# Altium PCB PCB1.PcbDoc
Units mm, origin at the board's own origin, x right, y up, seen from the top; angles counter-clockwise.
Board outline 90.68 x 96.77 mm, 2 copper layers (Top Layer, Bottom Layer); 52 components, 34 nets, 229 pads, 27 vias.
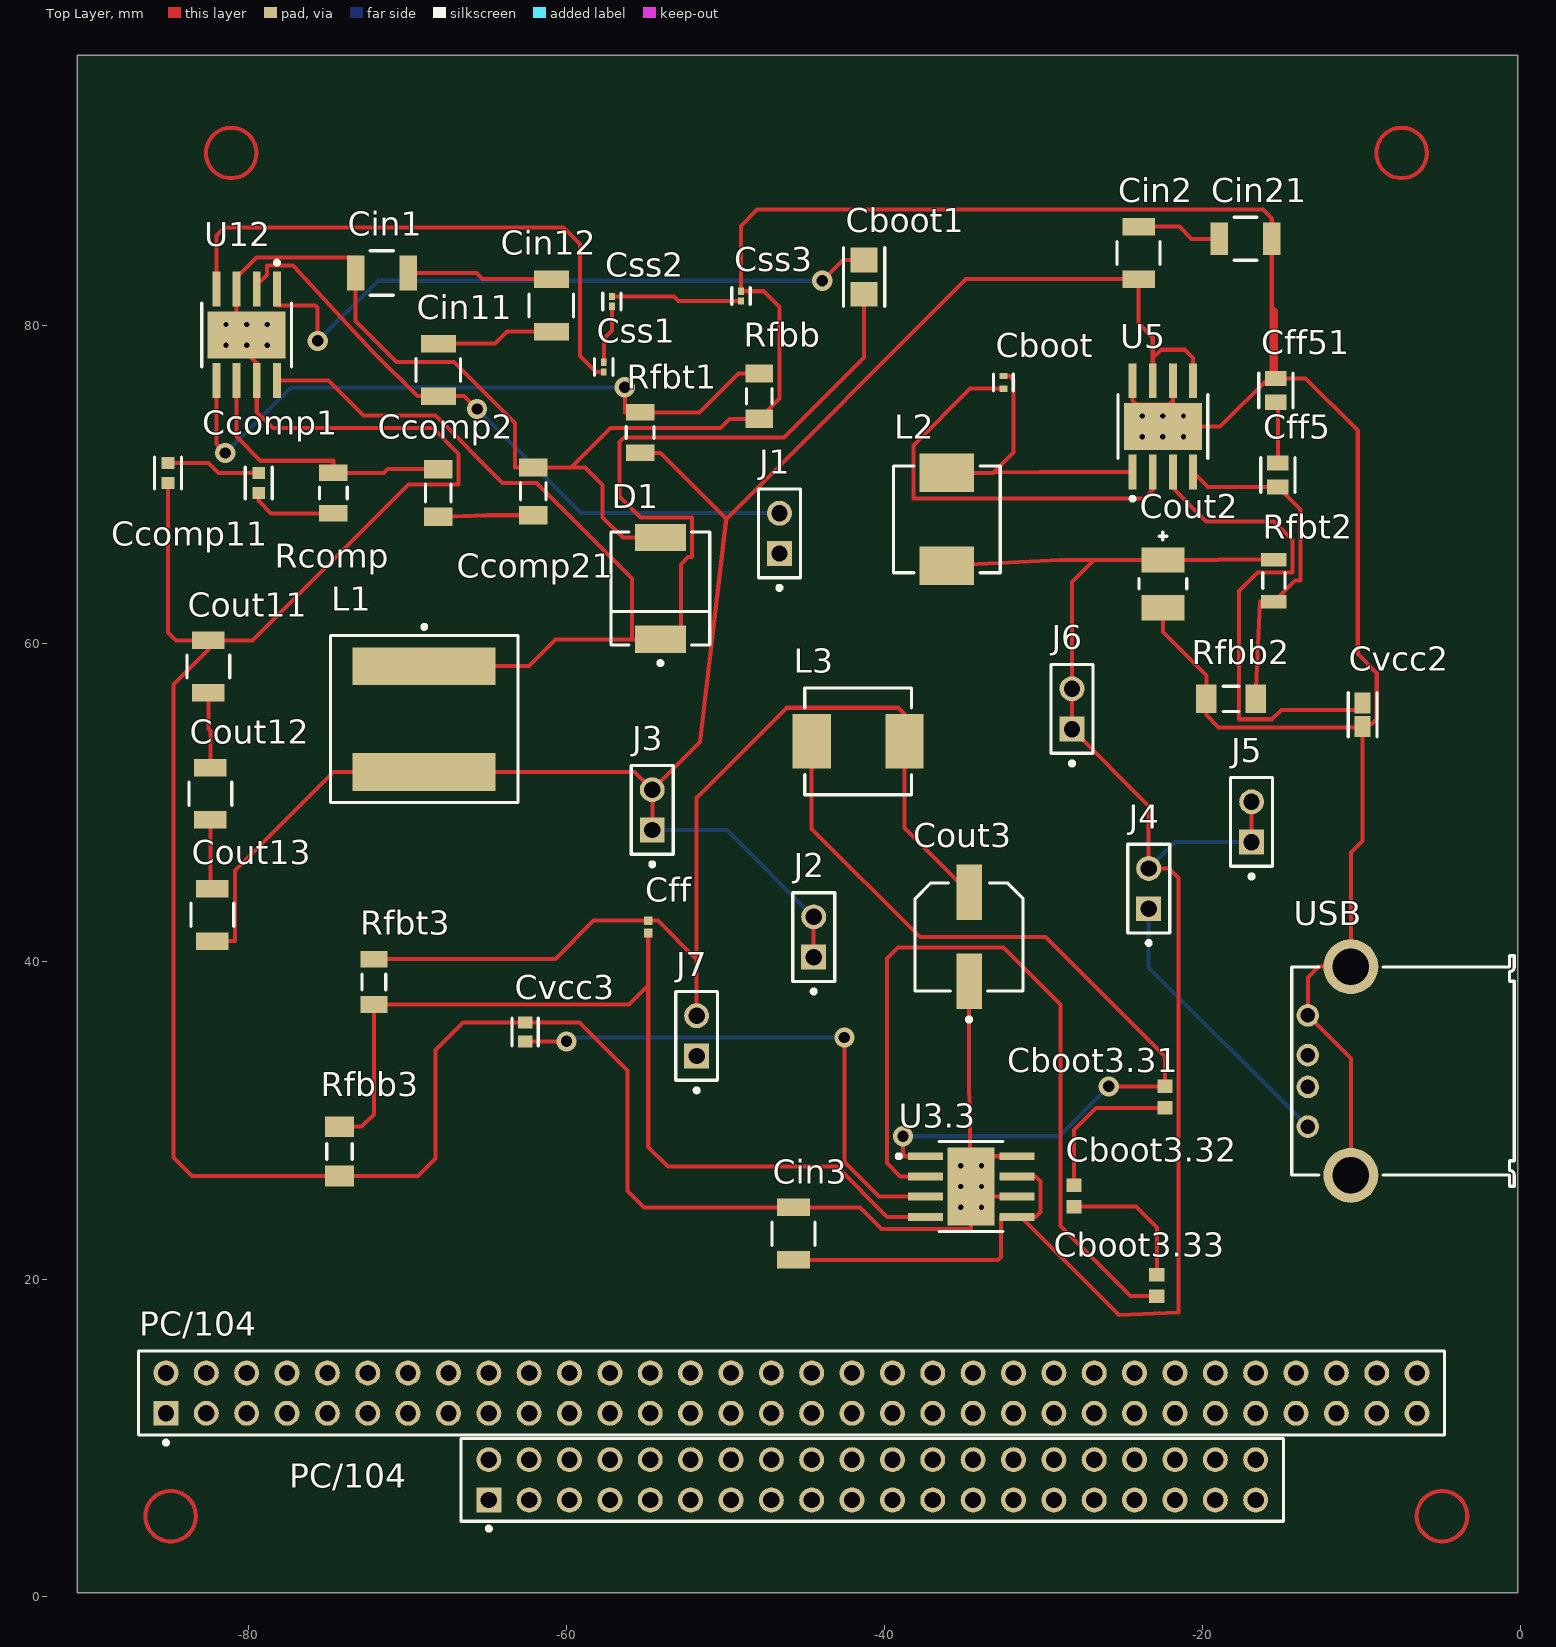
[diagram p0: Top Layer view]
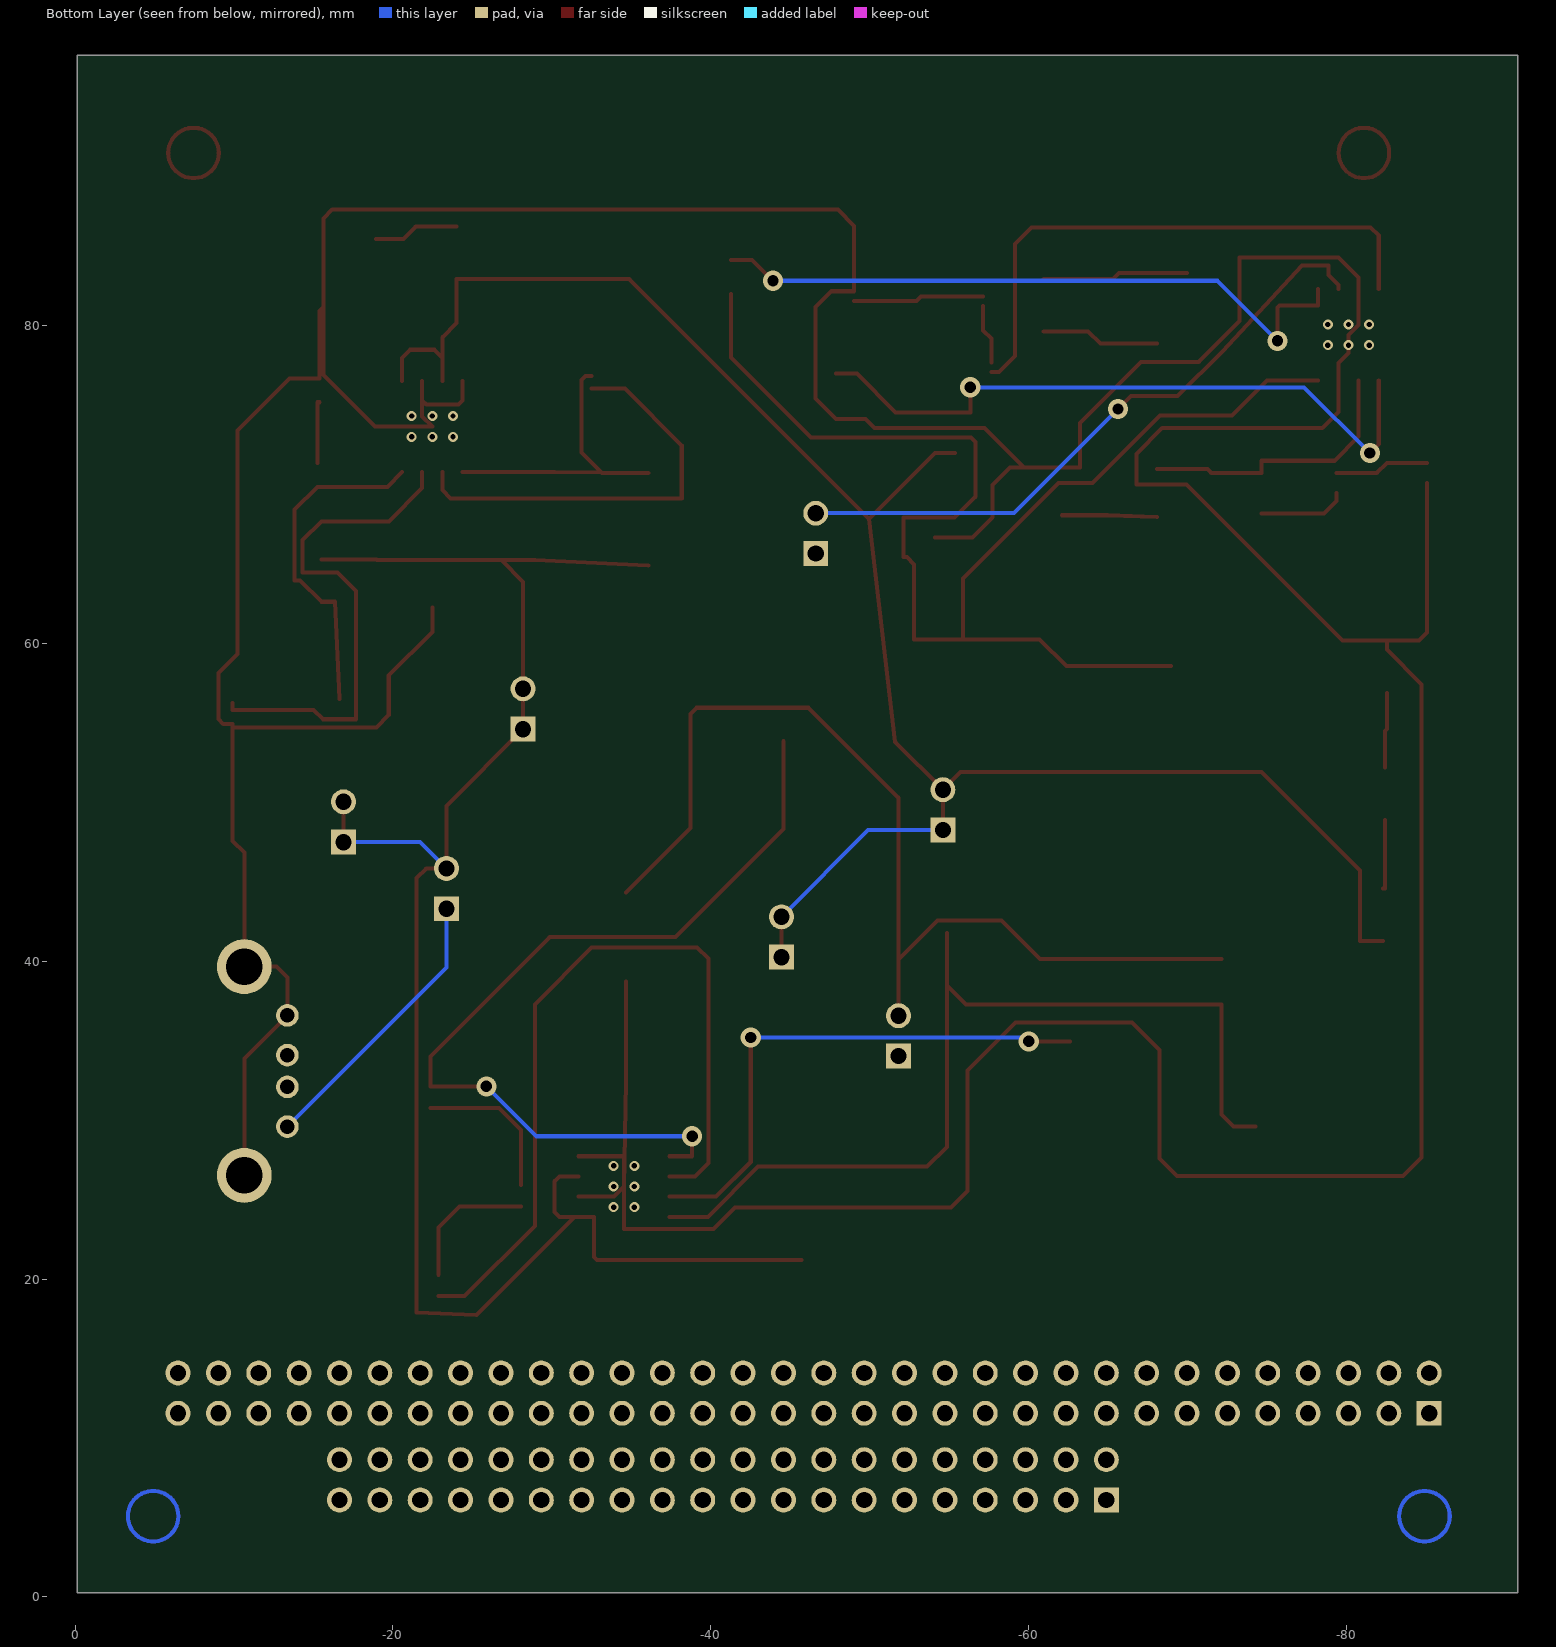
[diagram p1: Bottom Layer view, seen from below]
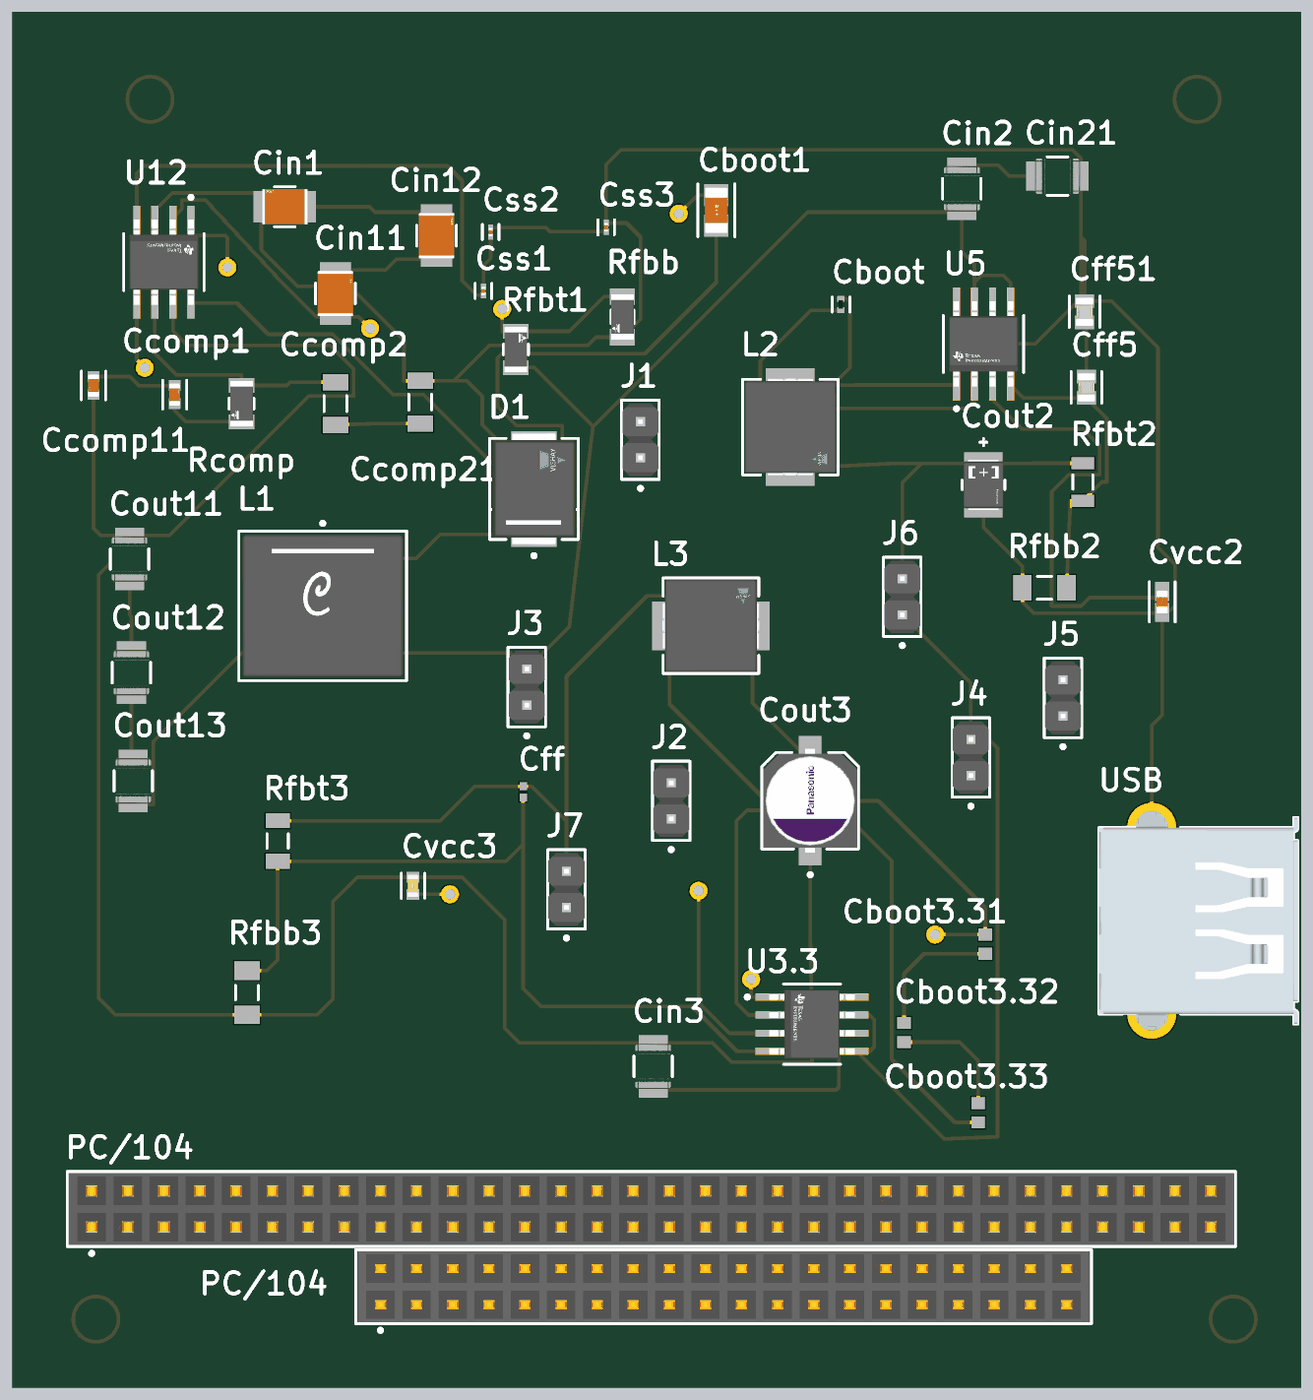
[diagram p2: 3D render of the assembled board from above, using the file's embedded part models]

## Layer stack, top to bottom
Top Solder: solder mask 0.0102, Solder Resist, Dk 3.5
Top Layer: signal copper 0.0356
Dielectric 1: dielectric 0.32, FR-4, Dk 4.8
Bottom Layer: signal copper 0.0356
Bottom Solder: solder mask 0.0102, Solder Resist, Dk 3.5

## Board outline
-90.805,0.254 -0.127,0.254 -0.127,97.028 -90.805,97.028

## Design rules (kind name [scope] priority, off if disabled: settings)
Clearance [All] p1: gap=0.254 ignorepadtopadclearanceinfootprint=FALSE except(0: Arc-Hole Track-Hole SMDPad-Hole THPad-Hole Via-Hole Fill-Hole Poly-Hole Region-Hole Text-Hole)
PolygonConnect [All] p1: connectstyle=Relief reliefconductorwidth=0.254 reliefentries=4 polygonreliefangle="90 Angle" airgapwidth=0.254
RoomDefinition Sheet1 [InComponentClass('Sheet1')] p1: confinementstyle=ConfineIn formatcopy=TRUE lockcomponents=FALSE outline 76.073,-2.717 473.202,-2.717 473.202,38.354 76.073,38.354
RoutingVias [All] p1: holewidth=0.711 width=1.27 viastyle="Through Hole" minholewidth=0.711 minwidth=1.27 maxholewidth=0.711 maxwidth=1.27
SolderMaskExpansion [All] p1: expansion=0.102 istentingtop=FALSE
Width [All] p1: maxlimit=0.254 minlimit=0.254 preferedwidth=0.254
30 further rules are at their usual default settings.

## Components (designator, comment, footprint, x,y, rotation, side; value= is the part's Value field where it differs from the comment)
Cboot "GRM155R71C104KA88D" FP-GRM15-MFG -32.512,76.435 r90 top value=0.10μF
Cboot1 "C3216C0G1H104K160AA" FP-C3216-160-0_2-IPC_C -41.275,83.058 r270 top
Cboot3.31 "GRM188R61E104KA01D" CAPC1608X90X35NL10T15 -22.352,31.456 r90 top
Cboot3.32 "GRM188R61E104KA01D" CAPC1608X90X35NL10T15 -28.067,25.233 r90 top
Cboot3.33 "GRM188R61E104KA01D" CAPC1608X90X35NL10T15 -22.86,19.598 r90 top
Ccomp1 "GRM1885C1H102JA01D" FP-GRM188-0_1-e0_2_0_5-IPC_C -79.375,70.104 r90 top
Ccomp2 "CAP 1pF 50V 1206(3216)" CAPC1206(3216)100_N -68.072,69.469 r90 top value=1pF
Ccomp11 "GRM1885C1H102JA01D" FP-GRM188-0_1-e0_2_0_5-IPC_C -85.09,70.739 r270 top
Ccomp21 "CAP 1pF 50V 1206(3216)" CAPC1206(3216)100_N -62.103,69.572 r270 top value=1pF
Cff "GRM1555C1E120JA01D" CAPC1005X55X25LL05T10 -54.864,42.164 r90 top
Cff5 "C0805C100K5GACTU" FP-C0805C-DN-MFG -15.24,70.612 r90 top value="10 pF"
Cff51 "C0805C100K5GACTU" FP-C0805C-DN-MFG -15.367,75.934 r90 top value="10 pF"
Cin1 "C3225X7R1H106M250AC" FP-C3225-250-0_4-MFG -71.629,83.312 r180 top
Cin2 "GRM32ER61E226KE15L" FP-GRM32-MFG -24.003,84.583 r90 top value=22uF
Cin3 "GRM32ER61E226KE15L" FP-GRM32-MFG -45.72,22.86 r90 top value=22uF
Cin11 "C3225X7R1H106M250AC" FP-C3225-250-0_4-MFG -68.072,77.217 r90 top
Cin12 "C3225X7R1H106M250AC" FP-C3225-250-0_4-MFG -60.96,81.28 r90 top
Cin21 "GRM32ER61E226KE15L" FP-GRM32-MFG -17.273,85.471 r0 top value=22uF
Cout2 "8TPE100MAZB" FP-POSCAP-B2-MFG -22.479,63.754 r90 top
Cout3 "16SVPE180M" FP-OS-CON-SMT-C10-MFG -34.671,41.535 r90 top
Cout11 "GRM32ER61E226KE15L" FP-GRM32-MFG -82.55,58.547 r90 top value=22uF
Cout12 "GRM32ER61E226KE15L" FP-GRM32-MFG -82.423,50.546 r90 top value=22uF
Cout13 "GRM32ER61E226KE15L" FP-GRM32-MFG -82.296,42.927 r90 top value=22uF
Css1 "GRM033R61A272KA01D" FP-GRM033-0_03-IPC_B -57.658,77.393 r90 top
Css2 "GRM033R61A272KA01D" FP-GRM033-0_03-IPC_B -57.15,81.534 r90 top
Css3 "GRM033R61A272KA01D" FP-GRM033-0_03-IPC_B -49.022,81.865 r90 top
Cvcc2 "C1608X6S1C225K080AC" FP-C1608-080-0_1-IPC_A -9.906,55.52 r270 top
Cvcc3 "C0603C225K8PACTU" FP-C0603C225K8PACTU-MFG -62.611,35.56 r90 top
D1 "SSC54-E3/57T" FP-95402-MFG -54.102,63.47 r90 top
J1 "M20-9990246" FP-M20-9990246-MFG -46.609,66.929 r90 top
J2 "M20-9990246" FP-M20-9990246-MFG -44.45,41.529 r90 top
J3 "M20-9990246" FP-M20-9990246-MFG -54.61,49.53 r90 top
J4 "M20-9990246" FP-M20-9990246-MFG -23.368,44.577 r90 top
J5 "M20-9990246" FP-M20-9990246-MFG -16.891,48.768 r90 top
J6 "M20-9990246" FP-M20-9990246-MFG -28.194,55.88 r90 top
J7 "M20-9990246" FP-M20-9990246-MFG -51.816,35.306 r90 top
L1 "XAL1010-153MED" FP-XAL1010-MFG -68.961,55.245 r270 top
L2 "IHLP2525CZER8R2M11" FP-IHLP-2525CZ-FP_2_413x3-MFG -36.068,67.818 r270 top
L3 "IHLP2525CZER4R7M01" FP-IHLP-2525CZ-FP_2_413x3-MFG -41.656,53.848 r0 top
PC/104 "M20-6102045" FP-M20-6102045-MFG -40.767,7.366 r0 top (schematic designator J?)
PC/104 "4P02-2D02-DA" FP-4P02-2D02-DA-MFG -45.847,12.827 r0 top
Rcomp "CRCW120614K7FKEA" FP-CRCW1206-e3-MFG -74.676,69.469 r270 top
Rfbb "CRCW1206732RFKEA" FP-CRCW1206-e3-IPC_B -47.879,75.565 r270 top
Rfbb2 "CRCW120622K1FKEA" RESC3216X60X45ML10T20 -18.187,56.515 r180 top
Rfbb3 "CRCW120622K1FKEA" RESC3216X60X45ML10T20 -74.295,28.041 r90 top
Rfbt1 "CRCW120610K2FKEA" FP-CRCW1206-e3-MFG -55.372,73.274 r90 top
Rfbt2 "RC1206FR-0788K7L" RESC3116X65X40LL10T20 -15.494,63.953 r90 top
Rfbt3 "RC1206FR-0751KL" RESC3116X65X40NL10T20 -72.136,38.707 r90 top
U3.3 "LMR23630ADDAR" FP-DDA0008E-MFG -34.544,25.827 r0 top
U5 "LMR23630ADDAR" FP-DDA0008E-MFG -22.479,73.66 r90 top
U12 "TPS54531DDAR" FP-DDA0008E-MFG -80.137,79.421 r270 top
USB "61400416021" 61400416021 -7.366,33.097 r90 top

## Footprints (in the part's own frame and the unit in brackets; to place one, negate y for a bottom-side part, rotate by r counter-clockwise, add the part's x,y. Pads: shape width x height; smd on the part's side, far side on the other; paste and mask are expansions set on the pad)
61400416021 [mm] "USB 2.0 Type A Horizontal"
  round 1.42 hole 0.92: 1(-3.5,5.99) 2(-1,5.99) 3(1,5.99) 4(3.5,5.99)
  round 3.45 hole 2.3: Shell(-6.57,3.28) Shell(6.57,3.28)
  silkscreen extent -7.25,-7 7.25,7, body extent -8,-7 8,7, height 7.63
CAPC1005X55X25LL05T10 [mm] "Chip Capacitor, 2-Leads, Body 1.00x0.50mm, IPC High Density"
  rect 0.56x0.52 smd: 1(-0.39,0) 2(0.39,0)
  body extent -0.53,-0.28 0.53,0.28, height 0.55
CAPC1206(3216)100_N [mm] "Chip Capacitor, Body 3.2x1.6mm, Height 1mm, IPC Medium Density"
  rect 1.15x1.8 smd: 1(-1.5,0) 2(1.5,0)
  silkscreen extent -0.55,-0.8 0.55,0.8, body extent -1.7,-0.9 1.7,0.9, height 1
CAPC1608X90X35NL10T15 [mm] "Chip Capacitor, 2-Leads, Body 1.60x0.80mm, IPC Medium Density"
  rect 0.85x0.95 smd: 1(-0.675,0) 2(0.675,0)
  body extent -0.85,-0.45 0.85,0.45, height 0.9
FP-4P02-2D02-DA-MFG [mm]
  rect 1.57x1.57 hole 1.02 paste-1000 mask+0: 1(-39.37,-1.27)
  round 1.57 hole 1.02 paste-1000 mask+0: 2(-39.37,1.27) 3(-36.83,-1.27) 4(-36.83,1.27) 5(-34.29,-1.27) 6(-34.29,1.27) 7(-31.75,-1.27) 8(-31.75,1.27) 9(-29.21,-1.27) 10(-29.21,1.27) 11(-26.67,-1.27) 12(-26.67,1.27) 13(-24.13,-1.27) 14(-24.13,1.27) 15(-21.59,-1.27) 16(-21.59,1.27) 17(-19.05,-1.27) 18(-19.05,1.27) 19(-16.51,-1.27) 20(-16.51,1.27) 21(-13.97,-1.27) 22(-13.97,1.27) 23(-11.43,-1.27) 24(-11.43,1.27) 25(-8.89,-1.27) 26(-8.89,1.27) 27(-6.35,-1.27) 28(-6.35,1.27) 29(-3.81,-1.27) 30(-3.81,1.27) 31(-1.27,-1.27) 32(-1.27,1.27) 33(1.27,-1.27) 34(1.27,1.27) 35(3.81,-1.27) 36(3.81,1.27) 37(6.35,-1.27) 38(6.35,1.27) 39(8.89,-1.27) 40(8.89,1.27) 41(11.43,-1.27) 42(11.43,1.27) 43(13.97,-1.27) 44(13.97,1.27) 45(16.51,-1.27) 46(16.51,1.27) 47(19.05,-1.27) 48(19.05,1.27) 49(21.59,-1.27) 50(21.59,1.27) 51(24.13,-1.27) 52(24.13,1.27) 53(26.67,-1.27) 54(26.67,1.27) 55(29.21,-1.27) 56(29.21,1.27) 57(31.75,-1.27) 58(31.75,1.27) 59(34.29,-1.27) 60(34.29,1.27) 61(36.83,-1.27) 62(36.83,1.27) 63(39.37,-1.27) 64(39.37,1.27)
  silkscreen extent -41.09,-3.24 41.09,2.64, body extent -41.19,-2.74 41.19,2.74, height 0.25
FP-95402-MFG [mm]
  rect 1.72x3.2 smd paste+0 mask+0: 1(-3.205,0) 2(3.205,0)
  silkscreen extent -4.82,-3.11 3.55,3.11, body extent -4.17,-3.21 4.17,3.21, height 0.25
FP-C0603C225K8PACTU-MFG [mm]
  rect 0.75x0.9 smd paste+0 mask+0: 1(-0.6,0) 2(0.6,0)
  silkscreen extent -0.87,-0.82 0.87,0.82, body extent -1.2,-0.6 1.2,0.6, height 0.25
FP-C0805C-DN-MFG [mm]
  rect 0.95x1.35 smd paste+0 mask+0: 1(-0.75,0) 2(0.75,0)
  silkscreen extent -1.1,-1.07 1.1,1.07, body extent -1.4,-0.85 1.4,0.85, height 0.25
FP-C1608-080-0_1-IPC_A [mm]
  rect 1.331x1.012 smd paste+0 mask+0: 1(-0.741,0) 2(0.741,0)
  silkscreen extent -1.41,-0.91 1.41,0.91, body extent -1.91,-1.01 1.91,1.01, height 0.25
FP-C3216-160-0_2-IPC_C [mm]
  rect 1.554x1.706 smd paste+0 mask+0: 1(-1.076,0) 2(1.076,0)
  silkscreen extent -1.85,-1.3 1.85,1.3, body extent -1.95,-1 1.95,1, height 0.25
FP-C3225-250-0_4-MFG [mm]
  rect 1.1x2.2 smd paste+0 mask+0: 1(-1.65,0) 2(1.65,0)
  silkscreen extent -0.73,-1.4 0.73,1.4, body extent -2.3,-1.5 2.3,1.5, height 0.25
FP-CRCW1206-e3-IPC_B [mm]
  rect 1.156x1.758 smd paste+0 mask+0: 1(-1.426,0) 2(1.426,0)
  silkscreen extent -0.47,-0.8 0.47,0.8, body extent -2.25,-1.13 2.25,1.13, height 0.25
FP-CRCW1206-e3-MFG [mm]
  rect 1.05x1.8 smd paste+0 mask+0: 1(-1.275,0) 2(1.275,0)
  silkscreen extent -0.38,-0.87 0.38,0.87, body extent -1.9,-1 1.9,1, height 0.25
FP-DDA0008E-MFG [mm]
  rect 2.2x0.5 smd paste-1000 mask+0: 1(-2.875,1.905) 2(-2.875,0.635) 3(-2.875,-0.635) 4(-2.875,-1.905) 5(2.875,-1.905) 6(2.875,-0.635) 7(2.875,0.635) 8(2.875,1.905)
  rect 2.95x4.9 smd paste-1000 mask-1000: 9(0,0)
  silkscreen extent -4.67,-2.82 2,2.82, body extent -4.08,-2.68 4.08,2.68, height 0.25
FP-GRM15-MFG [mm]
  rect 0.4x0.5 smd paste+0 mask+0: 1(-0.4,0) 2(0.4,0)
  silkscreen extent -0.53,-0.62 0.53,0.62, body extent -0.7,-0.38 0.7,0.38, height 0.25
FP-GRM32-MFG [mm]
  rect 1.1x2.05 smd paste+0 mask+0: 1(-1.65,0) 2(1.65,0)
  silkscreen extent -0.73,-1.35 0.73,1.35, body extent -2.3,-1.45 2.3,1.45, height 0.25
FP-GRM033-0_03-IPC_B [mm]
  rect 0.454x0.363 smd paste+0 mask+0: 1(-0.304,0) 2(0.304,0)
  silkscreen extent -0.53,-0.58 0.53,0.58, body extent -0.68,-0.33 0.68,0.33, height 0.25
FP-GRM188-0_1-e0_2_0_5-IPC_C [mm]
  rect 0.759x0.812 smd paste+0 mask+0: 1(-0.627,0) 2(0.627,0)
  silkscreen extent -1.01,-0.85 1.01,0.85, body extent -1.11,-0.55 1.11,0.55, height 0.25
FP-IHLP-2525CZ-FP_2_413x3-MFG [mil]
  rect 95x135 smd paste+0 mask+0: 1(-115,0) 2(115,0)
  silkscreen extent -132,-132 132,132, body extent -166,-136 166,136, height 10
FP-M20-6102045-MFG [mm]
  rect 1.57x1.57 hole 1.02 paste-1000 mask+0: 1(-24.13,-1.27)
  round 1.57 hole 1.02 paste-1000 mask+0: 2(-24.13,1.27) 3(-21.59,-1.27) 4(-21.59,1.27) 5(-19.05,-1.27) 6(-19.05,1.27) 7(-16.51,-1.27) 8(-16.51,1.27) 9(-13.97,-1.27) 10(-13.97,1.27) 11(-11.43,-1.27) 12(-11.43,1.27) 13(-8.89,-1.27) 14(-8.89,1.27) 15(-6.35,-1.27) 16(-6.35,1.27) 17(-3.81,-1.27) 18(-3.81,1.27) 19(-1.27,-1.27) 20(-1.27,1.27) 21(1.27,-1.27) 22(1.27,1.27) 23(3.81,-1.27) 24(3.81,1.27) 25(6.35,-1.27) 26(6.35,1.27) 27(8.89,-1.27) 28(8.89,1.27) 29(11.43,-1.27) 30(11.43,1.27) 31(13.97,-1.27) 32(13.97,1.27) 33(16.51,-1.27) 34(16.51,1.27) 35(19.05,-1.27) 36(19.05,1.27) 37(21.59,-1.27) 38(21.59,1.27) 39(24.13,-1.27) 40(24.13,1.27)
  silkscreen extent -25.88,-3.19 25.88,2.6, body extent -25.98,-2.7 25.98,2.7, height 0.25
FP-M20-9990246-MFG [mm]
  rect 1.57x1.57 hole 1.02 paste-1000 mask+0: 1(-1.27,0)
  round 1.57 hole 1.02 paste-1000 mask+0: 2(1.27,0)
  silkscreen extent -3.55,-1.32 2.79,1.32, body extent -2.89,-1.42 2.89,1.42, height 0.25
FP-OS-CON-SMT-C10-MFG [mm]
  rect 3.5x1.6 smd paste+0 mask+0: 1(-2.8,0) 2(2.8,0)
  silkscreen extent -5.32,-3.4 3.4,3.4, body extent -4.8,-3.65 4.8,3.65, height 0.25
FP-POSCAP-B2-MFG [mm]
  rect 1.6x2.7 smd paste+0 mask+0: 1(-1.5,0) 2(1.5,0)
  silkscreen extent -0.33,-1.5 3.25,1.5, body extent -2.4,-1.6 2.4,1.6, height 0.25
FP-XAL1010-MFG [mm]
  rect 2.38x9 smd paste+0 mask+0: 1(-3.325,0) 2(3.325,0)
  silkscreen extent -5.92,-5.9 5.25,5.9, body extent -5.35,-6 5.35,6, height 0.25
RESC3116X65X40LL10T20 [mm] "Chip Resistor, 2-Leads, Body 3.10x1.60mm, IPC High Density"
  rect 0.85x1.6 smd: 1(-1.325,0) 2(1.325,0)
  silkscreen extent -0.5,-0.7 0.5,0.7, body extent -1.6,-0.85 1.6,0.85, height 0.65
RESC3116X65X40NL10T20 [mm] "Chip Resistor, 2-Leads, Body 3.10x1.60mm, IPC Medium Density"
  rect 1.05x1.7 smd: 1(-1.425,0) 2(1.425,0)
  silkscreen extent -0.5,-0.75 0.5,0.75, body extent -1.6,-0.85 1.6,0.85, height 0.65
RESC3216X60X45ML10T20 [mm] "Chip Resistor, 2-Leads, Body 3.20x1.60mm, IPC Low Density"
  rect 1.3x1.8 smd: 1(-1.55,0) 2(1.55,0)
  silkscreen extent -0.5,-0.8 0.5,0.8, body extent -1.65,-0.85 1.65,0.85, height 0.6

## Part data
Cboot: library part CMP-2100-03641-2, "CAP CER 0.1UF 16V X7R 0402", Capacitance=0.10μF, Manufacturer=Murata, Package=GRM15, Temperature="-55°C to +125°C", Temperature Characteristic=X7R, Temperature Range High=+125°C, Temperature Range Low=-55°C, Tolerance=10%, Voltage Rating=16Vdc, Category=Cap, ComponentLink2Description=Datasheet, ComponentLink2URL=https://search.murata.co.jp/Ceramy/image/img/A01X/G101/ENG/GRM155R71H471KA01-01A.pdf, Device Class L1="Passive Components", Device Class L2=Capacitors, Device Class L3="Ceramic Capacitors", Digikey Description="CAP CER 0.1UF 16V X7R 0402", Height=0.55mm, Ipc Land Pattern Name=CAPC10050X219, Lead Free=yes, Manufacturer Part Number=GRM155R71C104KA88D, Material=Ceramic, Mouser Description="0402 0.1 uF 16V ±10 % Tolerance X7R SMT Multilayer Ceramic Capacitor", Octopart=https://octopart.com/grm155r71c104ka88d-murata-196880, RoHS=TRUE, Standoff Height=0mm
Cboot1: library part CMP-08246-004826-1, "Multilayer Ceramic Capacitors 100nF ±10% 50V C0G SMD 1206", Capacitance=100nF, Case Code (Imperial)=1206, Case Code (Metric)=3216, Dielectric=C0G, Dielectric Material=Ceramic, Max Operating Temperature=125°C, Min Operating Temperature=-55°C, Package Quantity=2000, Tolerance=10%, Voltage Rating=50V, Case/Package=1206, Height=1.6mm, Lead Free="Lead Free", Length=0.126inch, Mount="Surface Mount", Packaging="Tape and Reel", RoHS Compliant=Yes, Series=C, Termination=SMD/SMT, Thickness=0.071inch, Voltage Rating (DC)=50V, Weight=0.000571oz, Width=0.063inch
Cboot3.31 Cboot3.32 Cboot3.33: library part CMP-2006-02508-1, Manufacturer=Murata, Part Number=GRM188R61E104KA01D
Ccomp1 Ccomp11: library part CMP-1662-00022-2, "Chip Multilayer Ceramic Capacitors for General Purpose, 0603, 1000pF, C0G, 30ppm/°C, 5%, 50V", Capacitance=1nF, Case Code (Imperial)=0603, Case Code (Metric)=1608, Dielectric=C0G, Dielectric Material=Ceramic, Insulation Resistance=10GR, Max Operating Temperature=125°C, Min Operating Temperature=-55°C, Package Quantity=1, Temperature Coefficient=30ppm/°C, Tolerance=5%, Voltage=50V, Case/Package=0603, Depth=0.8mm, Height=0.8mm, Lead Free="Lead Free", Length=1.6mm, Material=Ceramic, Mount="Surface Mount", Number of Pins=2, Packaging="Tape and Reel", Radiation Hardening=No, REACH SVHC="No SVHC", Termination=SMD/SMT, Thickness=0.035inch, Voltage Rating=50V, Voltage Rating (DC)=50V, Width=0.8mm
Ccomp2 Ccomp21: library part CMP-1037-00024-1, "CAP 1pF 50V ±0.25pF 1206 (3216 Metric) Thickness 1mm SMD", Case-EIA=1206, Case-Metric=3216, Rated Voltage="50 V", Tolerance=Â±0.25pF, Max Thickness="1 mm", Technology=SMT
Cff: library part CMP-2008-03987-1, Manufacturer=Murata, Part Number=GRM1555C1E120JA01D
Cff5 Cff51: library part CMP-2007-00462-2, "CAP CER 10PF 50V 10% NP0 0805", Capacitance="10 pF", Manufacturer=KEMET, Package=C0805C-DN, Temperature="-55°C to +125°C", Temperature Characteristic=C0G, Temperature Coefficient=30ppm/°C, Temperature Range High=+125°C, Temperature Range Low=-55°C, Tolerance=0.1, Voltage Rating="50 V", Automotive=No, Category=Cap, ComponentLink2Description=Datasheet, ComponentLink2URL=https://content.kemet.com/datasheets/KEM_C1003_C0G_SMD.pdf, Device Class L1="Passive Components", Device Class L2=Capacitors, Device Class L3="Ceramic Capacitors", Digikey Description="CAP CER 10PF 50V 10% NP0 0805", Height=0.88mm, Ipc Land Pattern Name=CAPC200125X78, Lead Free=Yes, Manufacturer Part Number=C0805C100K5GACTU, Material=Ceramic, Mouser Description="Multilayer Ceramic Capacitors MLCC - SMD/SMT 50volts 10pF C0G 10%", Octopart=https://octopart.com/c0805c100k5gactu-kemet-8089747, RoHS=TRUE
Cin1 Cin11 Cin12: library part CMP-08246-002653-1, "Multilayer Ceramic Capacitors 10uF ±20% 50V X7R SMD 1210", Capacitance=10uF, Case Code (Imperial)=1210, Case Code (Metric)=3225, Dielectric=X7R, Dielectric Material=Ceramic, Max Operating Temperature=125°C, Min Operating Temperature=-55°C, Package Quantity=1000, Tolerance=20%, Voltage Rating=50V, Case/Package=1210, Height=2.5mm, Lead Free="Lead Free", Length=0.126inch, Mount="Surface Mount", Packaging="Tape and Reel", REACH SVHC="No SVHC", Series=C, Termination=SMD/SMT, Thickness=0.11inch, Voltage Rating (DC)=50V, Weight=0.000564oz, Width=0.098inch
Cin2 Cin3 Cin21 Cout11 Cout12 Cout13: library part CMP-2000-05458-2, "CAP CER 22UF 25V X5R 1210", Capacitance=22uF, Manufacturer="Murata Electronics North America", Operating Temperature="-55°C ~ 85°C", Package=GRM32, Package / Case="1210 (3225 Metric)", Standard Package=1,000, Temperature="-55°C to +85°C", Temperature Characteristic=X5R, Temperature Range High=+85°C, Temperature Range Low=-55°C, Tolerance=10%, Voltage - Rated=25V, Applications="General Purpose", Automotive=No, Category=Cap, ComponentLink2Description=Datasheet, ComponentLink2URL=https://search.murata.co.jp/Ceramy/image/img/A01X/G101/ENG/GRM32ER61E226KE15-01A.pdf, Device Class L1="Passive Components", Device Class L2=Capacitors, Device Class L3="Ceramic Capacitors", Digikey Description="CAP CER 22UF 25V X5R 1210", Height=2.7mm, Lead Free=Yes, Manufacturer Part Number=GRM32ER61E226KE15L, Material=Ceramic, Mounting Type="Surface Mount, MLCC", Mouser Description="Multilayer Ceramic Capacitors MLCC - SMD/SMT 1210 22uF 25volts X5R 10%", Octopart=https://octopart.com/grm32er61e226ke15l-murata-197441, Other Names=490-3889-2, Packaging="Cut Tape (CT)", Possible Substitute=GRM32ER61E226KE15K, RoHS=TRUE, Size / Dimension="0.126\" L x 0.098\" W (3.20mm x 2.50mm)", Temperature Coefficient=X5R, Thickness (Max)="0.106\" (2.70mm)", Voltage Rating=25V
Cout2: library part CMP-05428-001341-1, "Molded Tantalum Polymer Capacitor 100uF 20% 8V life 1000Hours SMD 1411", Capacitance=100uF, Case Code (Imperial)=1210, Case Code (Metric)=3528, Case/Package=Molded, ESR (Equivalent Series Resistance)=35mR, Leakage Current=80uA, Max Operating Temperature=105°C, Min Operating Temperature=-55°C, Package Quantity=2000, Ripple Current=1.4A, Tolerance=20%, Voltage=8V, Construction=Flat, Depth=2.8mm, Dissipation Factor=8%, Features="General Purpose", Height=1.9mm, Height - Seated (Max)=0.079inch, Lead Free="Lead Free", Length=3.5mm, Mount="Surface Mount", Number of Pins=2, Packaging="Tape and Reel", Polarity=Polar, Radiation Hardening=No, REACH SVHC="No SVHC", RoHS Compliant=Yes, Series="POSCAP™ TPE", Termination=SMD/SMT, Voltage Rating=8V, Voltage Rating (DC)=8V, Width=2.8mm
Cout3: library part CMP-05428-000600-1, "CAP ALUM POLY 180UF 20% 16V SMD", Capacitance=180uF, Case/Package=Radial, ESR (Equivalent Series Resistance)=11mR, Leakage Current=576uA, Max Operating Temperature=105°C, Min Operating Temperature=-55°C, Package Quantity=500, Ripple Current=4.46A, Tolerance=20%, Voltage=16V, Construction=Cylindrical, Diameter=6.3mm, Dissipation Factor=12%, Height=9.9mm, Height - Seated (Max)=0.394inch, Lead Free="Lead Free", Length=9.9mm, Life (Hours)=2000Hour, Mount="Surface Mount", Number of Pins=10, Packaging="Tape and Reel", Polarity=Polar, Radiation Hardening=No, REACH SVHC="No SVHC", Ripple Current (AC)=4.46A, RoHS Compliant=Yes, Series="OS-CON™, SVPE", Termination=SMD/SMT, Voltage Rating=16V, Voltage Rating (DC)=16V
Css1 Css2 Css3: library part CMP-2010-01672-2, "Chip Multilayer Ceramic Capacitors for General Purpose, 0201, 2700pF, X5R, 15%, 10%, 10V", Capacitance=2.7nF, Case Code (Imperial)=0201, Case Code (Metric)=0603, Dielectric=X5R, Max Operating Temperature=85°C, Min Operating Temperature=-55°C, Package Quantity=15000, Tolerance=10%, Voltage Rating=10V, Case/Package=0201, Depth=0.3mm, Height=0.3mm, Lead Free="Lead Free", Length=0.6mm, Mount="Surface Mount", Packaging="Tape and Reel", Radiation Hardening=No, Termination=SMD/SMT, Thickness=0.013inch, Voltage Rating (DC)=10V, Width=0.012inch
Cvcc2: library part CMP-08246-003448-1, "Multilayer Ceramic Capacitors 2.2μF ±10% 16V X6S SMD 0603", Capacitance=2.2uF, Case Code (Imperial)=0603, Case Code (Metric)=1608, Dielectric=X6S, Dielectric Material=Ceramic, Max Operating Temperature=105°C, Min Operating Temperature=-55°C, Package Quantity=1, Tolerance=10%, Voltage Rating=16V, Case/Package=0603, Construction=Flat, Depth=0.8mm, Height=0.8mm, Lead Free="Lead Free", Length=1.6mm, Mount="Surface Mount", Packaging="Tape and Reel", RoHS Compliant=Yes, Series=C, Thickness=0.035inch, Voltage Rating (DC)=16V, Width=0.031inch
Cvcc3: library part CMP-2006-02258-2, "CAP CER 2.2UF 10V X5R 0603", Capacitance=2.2uF, Case Code (Imperial)=0603, Case Code (Metric)=1608, Dielectric=X5R, Dielectric Material=Ceramic, Max Operating Temperature=85°C, Min Operating Temperature=-55°C, Package Quantity=1, Tolerance=10%, Voltage=10V, Case/Package=0603, Construction=Flat, Depth=0.8mm, Dissipation Factor=5%, Height=0.8mm, Lead Free="Lead Free", Lead Pitch=0.7mm, Length=1.6mm, Mount="Surface Mount", Number of Pins=2, Packaging="Tape and Reel", Radiation Hardening=No, REACH SVHC="No SVHC", RoHS Compliant=Yes, Series=C, Termination=SMD/SMT, Thickness=0.035inch, Voltage Rating=10V, Voltage Rating (DC)=10V, Width=0.031inch
D1: library part CMP-02539-000015-1, "DIODE SCHOTTKY 40V 5A DO214AB", Forward Current=5A, Manufacturer=Vishay, Max Junction Temp=+150°C, Max Repetitive Reverse Voltage=40V, Max Surge Forward Current=175A, Package=95402, Peak Reverse Current=0.5mA, Temperature="-65°C to +150°C", Temperature Range Low=-65°C, Automotive=No, Category=Diode, ComponentLink2Description=Datasheet, ComponentLink2URL=http://www.vishay.com/docs/88885/ssc53l.pdf, Device Class L1="Discrete Semiconductors", Device Class L2=Diodes, Device Class L3="Schottky Diodes", Digikey Description="DIODE SCHOTTKY 40V 5A DO214AB", Footprint Url=https://www.vishay.com/docs/95402/smc.pdf, Height=2.62mm, Lead Free=Yes, Manufacturer Part Number=SSC54-E3/57T, Mouser Description="SSC54 Series 40 V 5 A Surface Mount Schottky Rectifier - DO-214AB", Octopart=https://octopart.com/ssc54-e3%2F57t-vishay-39552944, Reverse Voltage=40V, RoHS=TRUE, Standoff Height=0mm, Temperature Range High=+150°C
J1 J2 J3 J4 J5 J6 J7: library part CMP-15831-000009-1, "CONN HEADER VERT 2POS 2.54MM", Current Rating=3A, Manufacturer=Harwin, Temperature="-40°C to +105°C", Temperature Range High=+105°C, Temperature Range Low=-40°C, Automotive=No, Category=Conn, ComponentLink2Description=Datasheet, ComponentLink2URL=https://cdn.harwin.com/pdfs/M20-999.pdf, Conn Gender=Male, Conn Orientation=Vertical, Contact Material=Tin,Nickel, Device Class L1=Connectors, Device Class L2="Headers and Wire Housings", Device Class L3=unset, Digikey Description="CONN HEADER VERT 2POS 2.54MM", Height=8.99mm, Lead Free=Yes, Manufacturer Part Number=M20-9990246, Mouser Description="2.54mm (0.1\") Pitch SIL Vertical PC Tail Pin Header, 6.1mm mating pin height, tin, 2 contacts", Number of Contacts=2, Number of Rows=1, Octopart=https://octopart.com/m20-9990246-harwin-2590635, Package=M20-9990246, Pitch=2.54mm, RoHS=TRUE
L1: library part CMP-11268-000117-1, "Fixed Inductors 15uH Shld 20% 13.8A 18.6mOhms AECQ2", Case/Package=SMD/SMT, DC Resistance (DCR)=18.6mR, Inductance=15uH, Inductance Tolerance=20%, Max DC Current=13.8A, Max Operating Temperature=125°C, Min Operating Temperature=-40°C, Package Quantity=300, Saturation Current=15.5A, Self Resonant Frequency=9MHz, Test Frequency=100kHz, Core Material=Composite, Height=10mm, Lead Free="Contains Lead", Length=11.8mm, Mount="Surface Mount", Packaging="Tape and Reel", REACH SVHC="No SVHC", RMS Current (Irms)=13.8A, RoHS Compliant=Yes, Series=XAL1010, Shielding=Shielded, Termination=SMD/SMT, Tolerance=20%, Width=10.5mm
L2: library part CMP-02424-000138-1, "Commercial Inductors, Low DCR Series 8.2uH 5A 54.9mΩ 20%", Case/Package=2525, Current Rating=5A, DC Resistance (DCR)=54.9mR, Inductance=8.2uH, Inductance Tolerance=20%, Max Operating Temperature=125°C, Min Operating Temperature=-55°C, Package Quantity=2000, Saturation Current=4A, Self Resonant Frequency=1MHz, Test Frequency=100kHz, Core Material=Metal, Depth=6.72mm, Height=3mm, Lead Free="Lead Free", Length=0.27inch, Max DC Current=5A, Military Standard=Not, Mount="Surface Mount", Number of Pins=2, Packaging="Tape and Reel", Radiation Hardening=No, RMS Current (Irms)=5A, Shielding=Shielded, Termination=SMD/SMT, Tolerance=20%, Width=0.255inch
L3: library part CMP-02424-000538-1, "Commercial Inductors, High Saturation Series 4.7uH 5.5A 40mΩ 20%", Case Code (Imperial)=2525, Case Code (Metric)=6363, Current Rating=5.5A, DC Resistance (DCR)=40mR, Inductance=4.7uH, Inductance Tolerance=20%, Max DC Current=10A, Max Operating Temperature=125°C, Min Operating Temperature=-55°C, Package Quantity=2000, Self Resonant Frequency=5MHz, Test Frequency=100kHz, Case/Package=2525, Contact Plating=Tin, Core Material=Metal, Depth=6.72mm, Height=3mm, Height - Seated (Max)=0.118inch, Lead Free="Lead Free", Length=7.24mm, Military Standard=Not, Mount="Surface Mount", Number of Pins=2, Packaging="Tape and Reel", Radiation Hardening=No, RMS Current (Irms)=5.5A, Saturation Current=10A, Shielding=Shielded, Termination=SMD/SMT, Tolerance=20%, Width=0.255inch
PC/104: library part CMP-15831-000080-1, "CONN STKTHRU PC/104 40POS PCB", Color=Black, Contact Resistance=30mR, Current Rating=3A, Flammability Rating="UL94 V-0", Insulation Resistance=5GR, Max Operating Temperature=105°C, Min Operating Temperature=-55°C, Package Quantity=11, Contact Material=Bronze, Contact Plating=Gold, Depth=5.25mm, Gender=Receptacle, Housing Color=Black, Housing Material=Nylon, Length=51.46mm, Material=Nylon, Max Current Rating=3A, Mount="Through Hole", Number of Contacts=40, Number of Positions=40, Number of Rows=2, Orientation=Straight, Packaging=Rail/Tube, Pitch=2.54mm, Radiation Hardening=No, REACH SVHC="No SVHC", Series=M20, Termination=Solder, Weight=0.218205oz
PC/104: library part CMP-05373-000001-1, "CONN STKTHRU PC/104 64POS PCB", Case/Package=Module, Contact Resistance=20mR, Current Rating=3A, Flammability Rating="UL94 V-0", Max Operating Temperature=105°C, Min Operating Temperature=-40°C, Package Quantity=665, Contact Material=Bronze, Contact Plating=Gold, Depth=5.08mm, Gender=Receptacle, Housing Material=Nylon, Length=81.98mm, Max Current Rating=3A, Mount="Through Hole", Number of Contacts=64, Number of Positions=64, Number of Rows=2, Orientation=Straight, Packaging=Rail/Tube, Pitch=2.54mm, RoHS Compliant=Yes, Series=4P02, Termination=Solder
Rcomp: library part CMP-1014-00640-3, "RES Thick Film, 14.7kΩ, 1%, 0.25W, 100ppm/°C, 1206", Case Code (Imperial)=1206, Case Code (Metric)=3216, Max Operating Temperature=155°C, Max Power Dissipation=250mW, Min Operating Temperature=-55°C, Package Quantity=10, Resistance=14.7kR, Temperature Coefficient=100ppm/°C, Tolerance=1%, Voltage Rating=200V, Case/Package=1206, Composition="Thick Film", Contact Plating=Tin, Depth=1.6mm, Features="Automotive AEC-Q200", Height=0.55mm, Lead Free="Lead Free", Length=3.2mm, Military Standard=Not, Number of Terminations=2, Packaging="Tape and Reel", Power Rating=250mW, Radiation Hardening=No, Termination=SMD/SMT, Voltage Rating (DC)=200V, Weight=0.000353oz, Width=1.6mm
Rfbb: library part CMP-2003-02370-2, "RES Thick Film, 732Ω, 1%, 0.25W, 100ppm/°C, 1206", Case Code (Imperial)=1206, Case Code (Metric)=3216, Max Operating Temperature=155°C, Max Power Dissipation=250mW, Min Operating Temperature=-55°C, Package Quantity=10, Resistance=732R, Temperature Coefficient=100ppm/°C, Tolerance=1%, Voltage Rating=200V, Case/Package=1206, Composition="Thick Film", Contact Plating=Tin, Depth=1.6mm, Features="Automotive AEC-Q200", Height=0.024inch, Height - Seated (Max)=0.024inch, Lead Free="Lead Free", Length=3.2mm, Military Standard=Not, Number of Pins=2, Number of Terminations=2, Packaging="Tape and Reel", Power Rating=250mW, Radiation Hardening=No, Termination=SMD/SMT, Voltage Rating (DC)=200V, Weight=0.000353oz, Width=1.6mm
Rfbb2 Rfbb3: library part CMP-1014-00660-2, Manufacturer="Vishay Dale", Part Number=CRCW120622K1FKEA
Rfbt1: library part CMP-1014-00624-3, "RES Thick Film, 10.2kΩ, 1%, 0.25W, 100ppm/°C, 1206", Case Code (Imperial)=1206, Case Code (Metric)=3216, Max Operating Temperature=155°C, Max Power Dissipation=250mW, Min Operating Temperature=-55°C, Package Quantity=10, Resistance=10.2kR, Temperature Coefficient=100ppm/°C, Tolerance=1%, Voltage Rating=200V, Case/Package=1206, Composition="Thick Film", Contact Plating=Tin, Depth=1.6mm, Features="Automotive AEC-Q200", Height=0.024inch, Lead Free="Lead Free", Length=3.2mm, Military Standard=Not, Number of Pins=2, Number of Terminations=2, Packaging="Tape and Reel", Power Rating=250mW, Radiation Hardening=No, Termination=SMD/SMT, Voltage Rating (DC)=200V, Weight=0.000353oz, Width=1.6mm
Rfbt2: library part CMP-2003-03890-1, Manufacturer=Yageo, Part Number=RC1206FR-0788K7L
Rfbt3: library part CMP-2003-03796-1, Manufacturer=Yageo, Part Number=RC1206FR-0751KL
U3.3 U5: library part CMP-04918-000336-1, "IC REG BUCK ADJUSTABLE 3A 8SOPWR", Max Input Voltage=36V, Max Operating Temperature=125°C, Max Output Voltage=28V, Min Input Voltage=4V, Min Operating Temperature=-40°C, Min Output Voltage=1V, Output Current=3A, Quiescent Current=75uA, Switching Frequency=2.425MHz, Lead Free="Lead Free", Mount="Surface Mount", Number of Outputs=1, Number of Pins=8, Output Configuration=Positive, Output Type=Adjustable, Packaging="Tape and Reel", RoHS Compliant=Yes, Synchronous Rectifier=Yes
U12: library part CMP-04918-000157-1, "IC REG BUCK ADJUSTABLE 5A 8SOPWR", Case/Package=SOIC, Max Input Voltage=28V, Max Operating Temperature=85°C, Max Output Current=5A, Max Output Voltage=26.04V, Min Input Voltage=3.5V, Min Operating Temperature=-40°C, Min Output Voltage=800mV, Output Voltage=25V, Package Quantity=2500, Quiescent Current=110uA, Switching Frequency=570kHz, Lead Free="Lead Free", Min Supply Voltage=3.5V, Mount="Surface Mount", Number of Outputs=1, Number of Pins=8, Operating Supply Voltage=28V, Output Configuration=Positive, Output Current=5A, Output Type=Adjustable, Packaging="Tape and Reel", Radiation Hardening=No, REACH SVHC="No SVHC", Synchronous Rectifier=No
USB: library part CMP-1502-03227-1, "USB 2.0 Type A Receptacle WR-COM, Horizontal, THT", Contact Resistance=20mOhm, Manufacturer="Wurth Elektronik", Operating Temperature=-40to105degC, Rated Current=1.5A, Working Voltage=30VAC, Connector Type=USB2.0TypeA, Datasheet URL=https://katalog.we-online.de/em/datasheet/61400416021.pdf, Gender=Receptacle, Manufacturer URL=http://www.we-online.de, Mounting Technology=THT, Orientation=Horizontal, Package Reference=61400416021, Packaging=Tray, Part Number=61400416021, Publisher=WurthElektronik

## Via types
v1: diameter 0.63, hole 0.33, Top Layer to Bottom Layer, 18 vias
v2: diameter 1.27, hole 0.711, Top Layer to Bottom Layer, 9 vias

## Nets (pads, with @x,y where several pads share a name; then routed paths per layer and width w, separated by ;. In a path a pad name is that pad's centre, name@x,y a point inside that pad or via, vN(x,y) a via of type N, cw(c..) or ccw(c..) an arc to the next point about the centre after c; other vN are vias at no path point)
3.3V: J7.1
5V: Cin3.1 Cout2.2 J4.2 J5.1 J5.2 J6.1 J6.2 L2.2 Rfbt2.2 U3.3.5 U3.3.7 | length 116.1
  Top Layer w0.254: Cin3.1 -32.841,21.21 -32.664,21.387 -32.664,23.922 U3.3.5 U3.3.5@-31.42,23.922 ; L2.2 -28.929,65.254 -26.821,65.254 ; U3.3.7 -30.48,26.462 -30.175,26.157 -30.175,24.227 -30.48,23.922 U3.3.5@-31.42,23.922 ; J5.1 J5.2 ; Rfbt2.2 -18.975,65.278 -18.999,65.254 Cout2.2 -26.821,65.254 ; U3.3.5@-31.42,23.922 -25.252,17.755 -21.488,17.907 -21.488,45.237 -22.098,45.847 J4.2 -23.368,49.784 J6.1 J6.2 -28.194,63.881 -26.821,65.254
  Bottom Layer w0.254: J4.2 -21.717,47.498 J5.1
12V: Cin2.1 Cout13.1 J2.1 J2.2 J3.1 J3.2 L1.2 Rfbt1.1 U5.5 U5.7 | length 121.6
  Top Layer w0.254: Cout13.1 -80.874,41.277 -80.874,45.722 -74.676,51.92 L1.2 -55.73,51.92 J3.2 ; Rfbt1.1 -54.102,71.999 -49.954,67.851 ; J3.1 J3.2 ; J2.1 J2.2 ; U5.7 -23.114,77.978 ; U5.5 -20.574,77.978 -21.082,78.486 -22.606,78.486 -23.114,77.978 ; J3.2 -51.613,53.797 -49.954,67.851 ; -49.954,67.851 -34.872,82.933 Cin2.1 -24.003,80.162 -23.114,79.273 -23.114,77.978
  Bottom Layer w0.254: J3.1 -49.911,48.26 J2.2
GND: Ccomp11.2 Ccomp21.1 Cff51.2 Cin1.2 Cin3.2 Cin21.2 Cout2.1 Cout3.1 Cout11.2 Css3.2 Cvcc2.2 Cvcc3.2 D1.2 Rfbb2.2 Rfbb3.1 Rfbb.2 U3.3.6 U3.3.8 U3.3.9 U5.6 U5.8 U5.9 U12.3 U12.7 U12.9 USB.4 USB.Shell | length 389.6
  Top Layer w0.254: Ccomp11.2 -85.09,60.705 -84.582,60.197 Cout11.2 ; D1.2 -56.464,66.675 -57.734,67.945 -57.734,69.977 -58.829,71.072 -59.729,71.072 ; Cout3.1 -34.671,32.41 U3.3.9 ; U3.3.6 -33.909,25.192 U3.3.9 ; U3.3.8 -34.544,27.732 U3.3.9 ; U5.8 -24.384,75.286 -24.13,75.032 -22.098,75.032 -21.844,75.286 ; Cout2.1 -22.479,60.73 -19.737,57.988 Rfbb2.2 -19.737,55.5 -18.963,54.726 Cvcc2.2@-9.906,54.726 ; U5.6 -21.844,75.286 ; USB.Shell@-10.646,26.527 -10.646,33.887 USB.4 -13.356,38.989 -12.678,39.667 -10.646,39.667 -10.646,46.838 -9.906,47.578 Cvcc2.2@-9.906,54.726 ; Cout11.2 -79.757,60.197 -69.952,70.002 -66.791,70.002 -66.791,71.933 -68.417,73.558 -78.486,73.558 -79.502,74.574 U12.7 -79.502,77.648 -80.137,78.283 v1(-80.137,78.771) U12.9 -80.772,80.056 U12.3 -80.772,83.033 -79.52,84.285 -73.279,84.285 Cin1.2 -73.279,80.289 -70.714,77.724 -67.081,77.724 -63.246,73.889 -63.246,71.072 Ccomp21.1 -59.729,71.072 ; Cout11.2 -82.55,59.614 -84.734,57.429 -84.734,27.659 -83.566,26.491 Rfbb3.1 -69.342,26.491 -68.25,27.583 -68.25,34.417 -66.507,36.16 Cvcc3.2 -59.182,36.16 -56.158,33.136 -56.158,25.55 -55.118,24.51 Cin3.2 -41.528,24.51 -40.183,23.165 -34.544,23.165 U3.3.9 ; -59.729,71.072 -57.243,73.558 -50.317,73.558 -49.737,74.139 Rfbb.2 -46.609,75.409 -46.609,81.178 -47.6,82.169 Css3.2 -49.022,86.284 -48.006,87.3 -16.182,87.3 -15.623,86.741 Cin21.2 -15.623,81.18 ; -21.844,75.286 -21.844,74.295 U5.9 -18.872,73.66 -15.623,76.909 -15.623,81.18 ; -15.623,81.18 -15.367,80.924 Cff51.2 -13.489,76.684 -10.211,73.406 -10.211,59.334 -9.017,58.141 -9.017,55.245 -9.322,54.94 -9.906,54.94 Cvcc2.2 Cvcc2.2@-9.906,54.726
  other v1: -35.194,24.527 -33.894,24.527 -35.194,25.827 -33.894,25.827 -35.194,27.127 -33.894,27.127 -23.779,73.01 -22.479,73.01 -21.179,73.01 -23.779,74.31 -22.479,74.31 -21.179,74.31 -81.437,78.771 -78.837,78.771 -81.437,80.071 -80.137,80.071 -78.837,80.071
NetCboot1_1: Cboot1.1 U12.1 | length 42.2
  Top Layer w0.254: U12.1 -78.232,81.28 -75.794,81.28 -75.667,81.153 v2(-75.667,79.045) ; v2(-43.917,82.829) -42.612,84.134 Cboot1.1
  Bottom Layer w0.254: v2(-75.667,79.045) -71.882,82.829 v2(-43.917,82.829)
NetCboot1_2: Cboot1.2 D1.1 L1.1 U12.8 | length 86.4
  Top Layer w0.254: U12.8 -74.997,76.546 -72.796,74.346 -68.263,74.346 -64.021,70.104 -61.9,70.104 -55.88,64.084 -55.88,60.265 ; L1.1 -62.382,58.57 -60.687,60.265 -55.88,60.265 ; Cboot1.2 -41.275,78.003 -46.304,72.974 -56.388,72.974 -56.667,72.695 -56.667,69.237 -55.347,67.916 -52.121,67.916 -52.121,65.434 -52.346,65.434 -52.807,64.973 -52.807,60.265 D1.1 -55.88,60.265
NetCboot3.31_1: Cboot3.31.1 Cboot3.32.2 | length 9.8
  Top Layer w0.254: Cboot3.32.2 -28.067,29.384 -26.67,30.781 Cboot3.31.1
NetCboot3.31_2: Cboot3.31.2 L3.1 U3.3.1 | length 56
  Top Layer w0.254: L3.1 -44.577,48.336 -37.77,41.529 -29.87,41.529 -22.352,34.011 Cboot3.31.2 v2(-25.883,32.131) ; v2(-38.829,28.989) -38.829,27.732 U3.3.1
  Bottom Layer w0.254: v2(-38.829,28.989) -29.024,28.989 v2(-25.883,32.131)
NetCboot3.32_1: Cboot3.32.1 Cboot3.33.2 | length 8.7
  Top Layer w0.254: Cboot3.32.1 -24.177,24.558 -22.86,23.241 Cboot3.33.2
NetCboot3.33_1: Cboot3.33.1 U3.3.2 | length 50.2
  Top Layer w0.254: U3.3.2 -39.005,26.462 -39.848,27.305 -39.848,40.162 -39.141,40.869 -32.512,40.869 -28.931,37.287 -28.931,23.343 -24.511,18.923 Cboot3.33.1
NetCboot_1: Cboot.1 U5.2 | length 26.9
  Top Layer w0.254: Cboot.1 -34.607,76.035 -38.176,72.466 -38.176,69.139 -23.622,69.139 -23.114,69.647 U5.2
NetCboot_2: Cboot.2 L2.1 U5.1 | length 21.7
  Top Layer w0.254: Cboot.2 -32.131,76.835 -31.877,76.581 -31.877,72.009 -33.124,70.762 ; U5.1 -30.18,70.785 -33.124,70.762 ; -33.124,70.762 L2.1 -33.147,70.739 -33.124,70.762
NetCcomp1_1: Ccomp1.1 Rcomp.2 | length 5.5
  Top Layer w0.254: Ccomp1.1 -79.375,68.961 -78.608,68.194 Rcomp.2
NetCcomp1_2: Ccomp1.2 Ccomp11.1 | length 6
  Top Layer w0.254: Ccomp11.1 -82.55,71.366 -81.915,70.731 Ccomp1.2
NetCcomp2_1: Ccomp2.1 Ccomp21.2 | length 6
  Top Layer w0.254: Ccomp2.1 -64.972,68.072 Ccomp21.2
NetCcomp2_2: Ccomp2.2 Rcomp.1 U12.6 | length 17.7
  Top Layer w0.254: U12.6 -80.772,73.015 -79.258,71.501 -74.676,71.501 Rcomp.1 -71.501,70.744 -71.276,70.969 Ccomp2.2
NetCff5_1: Cff5.1 Rfbb2.1 Rfbt2.1 U5.4 | length 21.4
  Top Layer w0.254: U5.4 -19.651,69.862 Cff5.1 -13.805,68.427 -13.805,63.964 -14.158,63.964 Rfbt2.1 -16.366,62.628 Rfbb2.1
NetCff5_2: Cff5.2 Cff51.1 | length 3.9
  Top Layer w0.254: Cff51.1 -15.24,75.184 Cff5.2
NetCff_1: Cff.1 Rfbb3.2 Rfbt3.1 U3.3.4 | length 59.9
  Top Layer w0.254: Rfbb3.2 -72.898,29.591 -72.136,30.353 Rfbt3.1 -56.063,37.282 -54.864,38.481 ; Cff.1 -54.864,38.481 ; U3.3.4 -39.822,23.922 -42.977,27.076 -53.619,27.076 -54.864,28.321 -54.864,38.481
NetCff_2: Cff.2 Cout3.2 J7.2 L3.2 Rfbt3.2 | length 64.6
  Top Layer w0.254: Rfbt3.2 -60.715,40.132 -58.293,42.554 Cff.2 -54.263,42.554 -51.816,40.107 ; J7.2 -51.816,40.107 ; Cout3.2 -38.735,48.399 L3.2 -38.735,55.575 -39.116,55.956 -46.152,55.956 -51.816,50.292 -51.816,40.107
NetCin1_1: Cin1.1 Cin12.2 | length 9.2
  Top Layer w0.254: Cin1.1 -65.684,83.312 -65.302,82.93 Cin12.2
NetCin2_2: Cin2.2 Cin21.1 | length 5.4
  Top Layer w0.254: Cin2.2 -21.438,86.233 -20.676,85.471 Cin21.1
NetCin11_1: Cin11.1 J1.2 U12.2 | length 40.6
  Top Layer w0.254: U12.2 -79.502,82.55 -78.867,83.185 -78.867,83.777 -77.21,83.777 -72.209,78.389 -69.387,75.567 Cin11.1 -66.448,75.567 v2(-65.634,74.752)
  Bottom Layer w0.254: v2(-65.634,74.752) -59.08,68.199 J1.2
NetCin11_2: Cin11.2 Cin12.1 | length 7.4
  Top Layer w0.254: Cin11.2 -64.516,78.867 -63.753,79.63 Cin12.1
NetCout11_1: Cout11.1 Cout12.2 | length 4.8
  Top Layer w0.254: Cout11.1 -82.55,54.61 -82.423,54.483 Cout12.2
NetCout12_1: Cout12.1 Cout13.2 | length 4.4
  Top Layer w0.254: Cout12.1 -82.423,44.577 Cout13.2
NetCss1_1: Css1.1 U12.4 | length 35.9
  Top Layer w0.254: U12.4 -82.042,85.674 -81.534,86.182 -60.198,86.182 -59.157,85.141 -59.157,78.105 -58.141,77.089 Css1.1
NetCss1_2: Css1.2 Css2.1 | length 3.7
  Top Layer w0.254: Css1.2 -57.658,79.197 -57.15,79.705 Css2.1
NetCss2_2: Css2.2 Css3.1 | length 8.2
  Top Layer w0.254: Css2.2 -53.238,81.838 -52.961,81.56 Css3.1
NetCvcc2_1: Cvcc2.1 U5.3 | length 32.3
  Top Layer w0.254: U5.3 -21.844,69.774 -19.761,67.691 -15.494,67.691 -14.313,66.51 -14.313,64.465 -16.51,64.465 -17.678,63.297 -17.678,55.234 -15.596,55.234 -15,55.829 -9.906,55.829 Cvcc2.1
NetCvcc3_1: Cvcc3.1 U3.3.3 | length 34
  Top Layer w0.254: Cvcc3.1 v2(-60.011,34.96) ; v2(-42.52,35.204) -42.52,27.364 -40.347,25.192 U3.3.3
  Bottom Layer w0.254: v2(-60.011,34.96) -59.766,35.204 v2(-42.52,35.204)
NetRfbb_1: Rfbb.1 Rfbt1.2 U12.5 | length 42.7
  Top Layer w0.254: U12.5 -82.042,72.542 v2(-81.483,71.984) ; v2(-56.337,76.124) -56.337,74.549 Rfbt1.2 -51.638,74.549 -49.196,76.991 Rfbb.1
  Bottom Layer w0.254: v2(-81.483,71.984) -77.343,76.124 v2(-56.337,76.124)
"R PI": J4.1 USB.1 | length 17.9
  Bottom Layer w0.254: J4.1 -23.368,39.609 USB.1
Vin: J1.1
pads on no net: PC/104.1 PC/104.2 PC/104.3 PC/104.4 PC/104.5 PC/104.6 PC/104.7 PC/104.8 PC/104.9 PC/104.10 PC/104.11 PC/104.12 PC/104.13 PC/104.14 PC/104.15 PC/104.16 PC/104.17 PC/104.18 PC/104.19 PC/104.20 PC/104.21 PC/104.22 PC/104.23 PC/104.24 PC/104.25 PC/104.26 PC/104.27 PC/104.28 PC/104.29 PC/104.30 PC/104.31 PC/104.32 PC/104.33 PC/104.34 PC/104.35 PC/104.36 PC/104.37 PC/104.38 PC/104.39 PC/104.40 PC/104.41 PC/104.42 PC/104.43 PC/104.44 PC/104.45 PC/104.46 PC/104.47 PC/104.48 PC/104.49 PC/104.50 PC/104.51 PC/104.52 PC/104.53 PC/104.54 PC/104.55 PC/104.56 PC/104.57 PC/104.58 PC/104.59 PC/104.60 PC/104.61 PC/104.62 PC/104.63 PC/104.64 USB.2 USB.3
copper on no net: | length 20
  Top Layer w0.254: -79.52,90.87 ccw(c-81.11,90.87) -79.52,90.87 ; -5.86,90.87 ccw(c-7.45,90.87) -5.86,90.87

## Other copper
Multi-Layer:
  circle w0.254: c-84.92,5.08 r1.59
  circle w0.254: c-4.91,5.08 r1.59

## Text inside footprints (layer, text, board x,y; h text height)
USB: Mechanical 2 "PCB Edge" at 0.854,30.897 h0.81 r90